# Altium PCB Communication_board.PcbDoc (part 2 of 2)
Units mm, origin at the board's own origin, x right, y up, seen from the top; angles counter-clockwise.
Board outline 123 x 68.2 mm, 6 copper layers (Top Layer, Mid-Layer 1, Internal Plane 1, Mid-Layer 2, Mid-Layer 3, Bottom Layer); 199 components, 176 nets, 1115 pads, 336 vias.
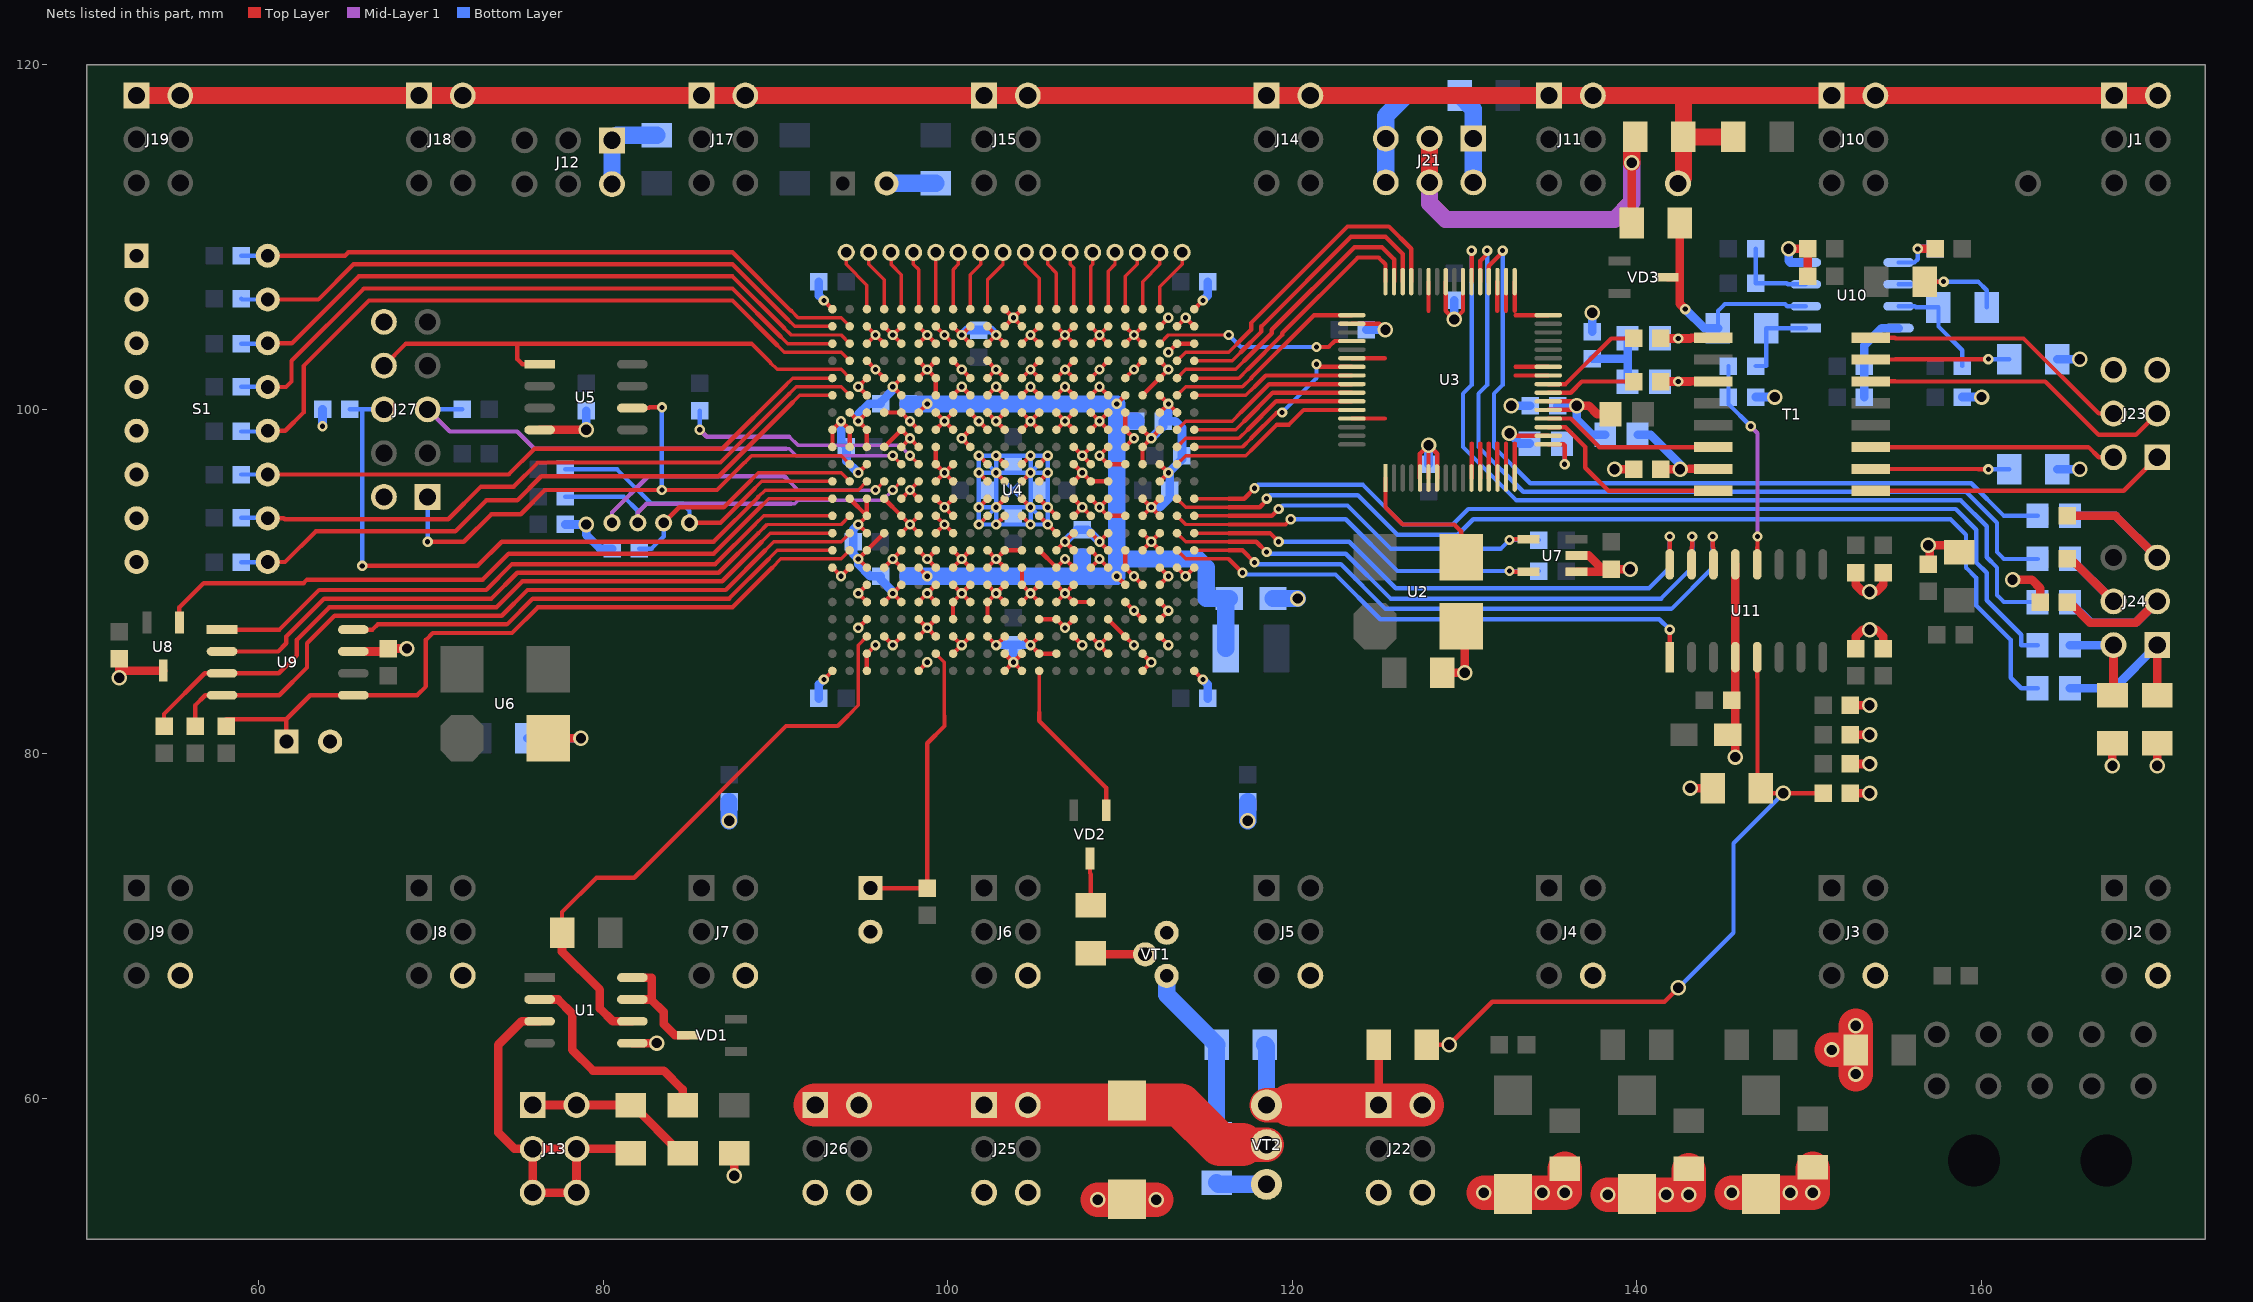
[diagram p6: the nets of this part, all layers, seen from the top]

## Via types
v1: diameter 0.6, hole 0.3, Top Layer to Bottom Layer, tented top, 188 vias
v2: diameter 0.9, hole 0.6, Top Layer to Bottom Layer, 100 vias
v3: diameter 0.6, hole 0.3, Top Layer to Bottom Layer, 48 vias

## Nets (pads, with @x,y where several pads share a name; then routed paths per layer and width w, separated by ;. In a path a pad name is that pad's centre, name@x,y a point inside that pad or via, vN(x,y) a via of type N, cw(c..) or ccw(c..) an arc to the next point about the centre after c; other vN are vias at no path point) (continued)
DCLK: J27.1 U4.K2 U5.6 | length 35.9
  Top Layer w0.2: 88.2,96.9 88.6,97.3 93.8,97.3 U4.K2@94.3,96.8
  Top Layer w0.254: v3(69.8,92.3) 71.9,92.3 73.5,93.9 75.2,93.9 76.6,95.3 v3(83.4,95.3) 86.6,95.3 88.2,96.9 ; U5.6@81.685,100.06 82.66,100.06 82.7,100.1 v3(83.4,100.1)
  Bottom Layer w0.254: v3(69.8,92.3) J27.1@69.8,94.9 ; v3(83.4,95.3) v3(83.4,100.1)
ETHADDRSELECT0: R13.1 S1.16 U4.B2 | length 37.2
  Top Layer w0.2: 90.9,105.7 91.3,105.3 93.8,105.3 U4.B2@94.3,104.8
  Top Layer w0.254: S1.16@60.52,108.9 65,108.9 65.2,109.1 87.5,109.1 90.9,105.7
  Bottom Layer w0.254: R13.1@58.987,108.9 S1.16@60.52,108.9
ETHADDRSELECT1: R14.1 S1.15 U4.B1 | length 36.7
  Top Layer w0.2: 90.7,105.2 91.1,104.8 U4.B1@93.3,104.8
  Top Layer w0.254: S1.15@60.52,106.36 63.46,106.36 65.5,108.4 87.5,108.4 90.7,105.2
  Bottom Layer w0.254: R14.1@58.987,106.4 59.027,106.36 S1.15@60.52,106.36
ETHADDRSELECT2: R15.1 S1.14 U4.C2 | length 38.5
  Top Layer w0.2: 90.5,104.7 90.9,104.3 93.8,104.3 U4.C2@94.3,103.8
  Top Layer w0.254: S1.14@60.52,103.82 61.92,103.82 65.8,107.7 87.5,107.7 90.5,104.7
  Bottom Layer w0.254: R15.1@58.987,103.8 60.5,103.8 S1.14@60.52,103.82
ETHADDRSELECT3: R16.1 S1.13 U4.C1 | length 38.7
  Top Layer w0.2: 90.3,104.2 90.7,103.8 U4.C1@93.3,103.8
  Top Layer w0.254: S1.13@60.52,101.28 61.58,101.28 61.9,101.6 61.9,102.8 66.1,107 87.5,107 90.3,104.2
  Bottom Layer w0.254: R16.1@58.987,101.3 60.5,101.3 S1.13@60.52,101.28
ETHADDRSELECT4: R17.1 S1.12 U4.D2 | length 41.5
  Top Layer w0.2: 90.1,103.7 90.5,103.3 93.8,103.3 U4.D2@94.3,102.8
  Top Layer w0.254: S1.12@60.52,98.74 61.54,98.74 62.6,99.8 62.6,102.5 66.4,106.3 87.5,106.3 90.1,103.7
  Bottom Layer w0.254: R17.1@58.987,98.7 60.48,98.7 S1.12@60.52,98.74
ETHADDRSELECT5: R18.1 S1.11 U4.E1 | length 36.6
  Top Layer w0.2: 90.6,101.4 91,101.8 U4.E1@93.3,101.8
  Top Layer w0.254: S1.11@60.52,96.2 74.5,96.2 76,97.7 86.9,97.7 90.6,101.4
  Bottom Layer w0.254: R18.1@58.987,96.2 S1.11@60.52,96.2
ETHADDRSELECT6: R19.1 S1.10 U4.F2 | length 38.8
  Top Layer w0.2: 90.8,100.9 91.2,101.3 93.8,101.3 U4.F2@94.3,100.8
  Top Layer w0.254: S1.10@60.52,93.66 61.44,93.66 61.5,93.6 71,93.6 72.9,95.5 74.8,95.5 76.2,96.9 86.8,96.9 90.8,100.9
  Bottom Layer w0.254: R19.1@58.987,93.7 60.48,93.7 S1.10@60.52,93.66
ETHADDRSELECT7: R20.1 S1.9 U4.F1 | length 38.3
  Top Layer w0.2: 91,100.4 91.4,100.8 U4.F1@93.3,100.8
  Top Layer w0.254: S1.9@60.52,91.12 61.52,91.12 63.3,92.9 71.4,92.9 73.2,94.7 75,94.7 76.4,96.1 86.7,96.1 91,100.4
  Bottom Layer w0.254: R20.1@58.987,91.1 60.5,91.1 S1.9@60.52,91.12
ETHRX_CLK: U3.52 U4.C20 | length 11.8
  Top Layer w0.2: U4.C20@112.3,103.8 112.8,104.3 v3(116.3,104.3)
  Top Layer w0.254: v3(121.4,103.6) 122.1,103.6 122.45,103.95 U3.52@123.45,103.95
  Bottom Layer w0.254: v3(116.3,104.3) 117,103.6 v3(121.4,103.6)
ETHRX_DV: U3.49 U4.F21 | length 12.1
  Top Layer w0.2: U4.F21@113.3,100.8 113.8,101.3 117.1,101.3 117.6,101.8
  Top Layer w0.254: 117.6,101.8 121.25,105.45 U3.49@123.45,105.45
ETHRXD0: U3.48 U4.E22 | length 15.2
  Top Layer w0.2: U4.E22@114.3,101.8 116.9,101.8 117.4,102.3
  Top Layer w0.254: 117.4,102.3 119.4,104.3 119.4,104.4 123.8,108.8 125,108.8 125.4,108.4 U3.48@125.4,107.4
ETHRXD1: U3.47 U4.E21 | length 17.5
  Top Layer w0.2: U4.E21@113.3,101.8 113.8,102.3 116.7,102.3 117.2,102.8
  Top Layer w0.254: 117.2,102.8 118.8,104.4 118.8,104.6 123.6,109.4 125.2,109.4 125.9,108.7 U3.47@125.9,107.4
ETHRXD2: U3.46 U4.D22 | length 17.3
  Top Layer w0.2: U4.D22@114.3,102.8 116.5,102.8 117,103.3
  Top Layer w0.254: 117,103.3 118.2,104.5 118.2,104.8 123.4,110 125.4,110 126.4,109 U3.46@126.4,107.4
ETHRXD3: U3.45 U4.D21 | length 19.5
  Top Layer w0.2: U4.D21@113.3,102.8 113.8,103.3 116.3,103.3 116.8,103.8
  Top Layer w0.254: 116.8,103.8 117.6,104.6 117.6,105 123.2,110.6 125.6,110.6 126.9,109.3 U3.45@126.9,107.4
ETHTX_CLK: U3.55 U4.J22 | length 11.7
  Top Layer w0.2: U4.J22@114.3,97.8 117.1,97.8 117.6,98.3
  Top Layer w0.254: 117.6,98.3 119.1,99.8 v3(119.4,99.8) ; v3(121.4,102.6) 121.55,102.45 U3.55@123.45,102.45
  Bottom Layer w0.254: v3(119.4,99.8) 121.4,101.8 v3(121.4,102.6)
ETHTX_EN: U3.56 U4.F22 | length 9.6
  Top Layer w0.2: U4.F22@114.3,100.8 117.3,100.8 117.8,101.3
  Top Layer w0.254: 117.8,101.3 118.45,101.95 U3.56@123.45,101.95
ETHTXD0: U3.57 U4.H21 | length 11.2
  Top Layer w0.2: U4.H21@113.3,98.8 113.8,99.3 116.5,99.3 117,99.8
  Top Layer w0.254: 117,99.8 118.65,101.45 U3.57@123.45,101.45
ETHTXD1: U3.58 U4.H22 | length 10
  Top Layer w0.2: U4.H22@114.3,98.8 116.7,98.8 117.2,99.3
  Top Layer w0.254: 117.2,99.3 118.85,100.95 U3.58@123.45,100.95
ETHTXD2: U3.59 U4.J21 | length 11.2
  Top Layer w0.2: U4.J21@113.3,97.8 113.8,98.3 116.9,98.3 117.4,98.8
  Top Layer w0.254: 117.4,98.8 119.05,100.45 U3.59@123.45,100.45
ETHTXD3: U3.60 U4.K21 | length 11.5
  Top Layer w0.2: U4.K21@113.3,96.8 113.8,97.3 117.3,97.3 117.8,97.8
  Top Layer w0.254: 117.8,97.8 119.1,99.1 119.8,99.1 120.65,99.95 U3.60@123.45,99.95
ETHVCCA: C7.2 L1.2 L2.1 U3.21 U3.22 | length 9.3
  Top Layer w0.254: U3.22@134.85,100.45 136.25,100.45 v2(136.5,100.2)
  Top Layer w0.256: U3.21@134.85,99.95 v2@136.25,99.95
  Top Layer w0.5: v2(136.5,100.2) 137.2,100.2 137.7,99.7 L1.2@138.46,99.7
  Bottom Layer w0.5: C7.2@135.387,100.2 v2(136.5,100.2) 136.5,99.4 137.4,98.5 L2.1@138.16,98.5
FANON: U4.AB13 VD2.1 | length 9.7
  Top Layer w0.2: 105.3,82.4 U4.AB13@105.3,84.8
  Top Layer w0.254: 105.3,82.4 105.3,81.9 109.192,78.008 VD2.1@109.192,76.71
FANPOWER: J22.1 J22.2 R37.2 R52.2 VT2.EMIT | length 16.1
  Top Layer w0.5: J22.1@125,59.6 125,63.097 R52.2@125.003,63.1
  Top Layer w2: VT2.EMIT@118.5,59.6 119.9,59.6
  Top Layer w2.5: 119.9,59.6 J22.1@125,59.6 J22.2@127.54,59.6
  Bottom Layer w1: R37.2@118.397,63.1 118.5,62.997 VT2.EMIT@118.5,59.6
FANPOWER_MEASURE: C59.2 R52.1 R55.2 U11.5 | length 41.2
  Top Layer w0.254: R52.1@127.797,63.1 v2(129.1,63.1) 131.6,65.6 141.6,65.6 v2(142.4,66.4) ; U11.5@146.98,85.6 146.98,84.42 147,84.4 147,78.197 147.497,77.7 C59.2@150.813,77.7
  Bottom Layer w0.254: v2(142.4,66.4) 145.6,69.6 145.6,74.8 v2(148.5,77.7)
FLASH_NCS: R35.1 U4.P2 U9.4 | length 44.2
  Top Layer w0.2: 89.4,91.8 89.9,92.3 93.8,92.3 U4.P2@94.3,92.8
  Top Layer w0.254: R35.1@56.3,81.587 56.3,82.8 56.89,83.39 U9.4@57.865,83.39 61.19,83.39 62.8,85 62.8,86.4 64.4,88 74.1,88 75.6,89.5 87.1,89.5 89.4,91.8
FLASH_NRESET: R34.1 U4.P1 U9.3 | length 44.4
  Top Layer w0.2: 89.2,92.3 89.7,92.8 U4.P1@93.3,92.8
  Top Layer w0.254: R34.1@54.5,81.587 54.5,82.3 56.86,84.66 U9.3@57.865,84.66 61.16,84.66 62.2,85.7 62.2,86.6 64.1,88.5 73.8,88.5 75.3,90 86.9,90 89.2,92.3
FLASH_NWP: J28.1 R36.1 U4.R2 U9.5 | length 43.6
  Top Layer w0.2: 89.8,90.8 90.3,91.3 93.8,91.3 U4.R2@94.3,91.8
  Top Layer w0.254: R36.1@58.1,81.587 58.1,82 61.6,82 ; J28.1@61.6,80.7 61.6,82 ; 89.8,90.8 87.5,88.5 76.2,88.5 74.7,87 70.1,87 69.7,86.6 69.7,83.9 69.19,83.39 U9.5@65.485,83.39 62.99,83.39 61.6,82
FLASH_SCK: U4.N2 U9.2 | length 39.9
  Top Layer w0.2: 89,92.8 89.5,93.3 93.8,93.3 U4.N2@94.3,93.8
  Top Layer w0.254: U9.2@57.865,85.93 61.13,85.93 61.6,86.4 61.6,86.8 63.8,89 73.5,89 75,90.5 86.7,90.5 89,92.8
FLASH_SI: U4.N1 U9.1 | length 38.2
  Top Layer w0.2: 88.8,93.3 89.3,93.8 U4.N1@93.3,93.8
  Top Layer w0.254: U9.1@57.865,87.2 61.2,87.2 63.5,89.5 73.2,89.5 74.7,91 86.5,91 88.8,93.3
FLASH_SO: U4.R1 U9.8 | length 29.7
  Top Layer w0.2: 89.6,91.3 90.1,91.8 U4.R1@93.3,91.8
  Top Layer w0.254: U9.8@65.485,87.2 66.6,87.2 66.9,87.5 74.4,87.5 75.9,89 87.3,89 89.6,91.3
GND: C2.1 C3.1 C4.1 C5.1 C6.1 C7.1 C8.2 C9.1 C12.2 C13.1 C14.1 C15.1 C16.1 C17.1 C18.1 C19.1 C20.1 C21.1 C22.1 C23.1 C24.1 C25.- C26.1 C27.1 C28.1 C29.1 C30.1 C31.1 C32.1 C33.1 C34.1 C35.1 C36.1 C37.1 C38.1 C39.1 C40.1 C41.2 C42.- C43.2 C45.- C46.- C47.- C49.1 C50.1 C51.1 C56.1 C57.1 C58.1 C59.1 C60.1 C61.1 C62.- C63.1 C64.1 C65.1 J2.6 J3.6 J4.6 J5.6 J6.6 J7.6 J8.6 J9.6 J22.5 J22.6 J23.5 J23.6 J25.5 J25.6 J26.5 J26.6 J27.2 J27.10 J28.2 J29.2 R7.2 R21.2 R26.2 R28.2 R39.1 R54.1 R55.1 R56.1 R60.1 R61.1 S1.1 S1.2 S1.3 S1.4 S1.5 S1.6 S1.7 S1.8 U1.5 U2.2 U3.5 U3.6 U3.7 U3.11 U3.12 U3.13 U3.14 U3.15 U3.16 U3.18 U3.25 U3.26 U3.32 U3.33 U3.34 U3.35 U3.39 U3.41 U3.43 U3.50 U3.54 U3.61 U4.A1 U4.A11 U4.A12 U4.A22 U4.AA3 U4.AA8 U4.AA11 U4.AA12 U4.AA13 U4.AA14 U4.AA17 U4.AA19 U4.AB1 U4.AB3 U4.AB6 U4.AB11 U4.AB12 U4.AB19 U4.AB22 U4.B3 U4.B4 U4.B5 U4.B6 U4.B7 U4.B8 U4.B9 U4.B10 U4.B11 U4.B12 U4.B13 U4.B14 U4.B15 U4.B16 U4.B17 U4.B18 U4.B19 U4.B20 U4.B21 U4.B22 U4.C3 U4.C4 U4.C5 U4.C6 U4.C7 U4.C8 U4.C9 U4.C10 U4.C11 U4.C12 U4.C13 U4.C14 U4.C15 U4.C16 U4.C17 U4.C18 U4.C19 U4.C21 U4.C22 U4.D3 U4.D6 U4.D7 U4.D8 U4.D10 U4.D13 U4.D15 U4.D17 U4.D19 U4.D20 U4.E3 U4.E4 U4.E5 U4.E6 U4.E7 U4.E9 U4.E10 U4.E11 U4.E12 U4.E13 U4.E14 U4.E15 U4.E16 U4.E18 U4.E20 U4.F3 U4.F5 U4.F7 U4.F8 U4.F9 U4.F10 U4.F11 U4.F12 U4.F13 U4.F14 U4.F15 U4.F16 U4.F17 U4.F19 U4.F20 U4.G2 U4.G3 U4.G4 U4.G5 U4.G7 U4.G8 U4.G9 U4.G10 U4.G11 U4.G12 U4.G13 U4.G14 U4.G15 U4.G16 U4.G17 U4.G18 U4.G20 U4.G21 U4.H1 U4.H2 U4.H3 U4.H5 U4.H6 U4.H7 U4.H8 U4.H9 U4.H10 U4.H11 U4.H12 U4.H13 U4.H14 U4.H15 U4.H16 U4.H17 U4.H18 U4.H19 U4.H20 U4.J1 U4.J2 U4.J3 U4.J4 U4.J5 U4.J6 U4.J7 U4.J9 U4.J15 U4.J16 U4.J17 U4.J18 U4.J19 U4.K3 U4.K7 U4.K8 U4.K10 U4.K11 U4.K12 U4.K13 U4.K15 U4.K16 U4.K17 U4.K18 U4.K19 U4.K20 U4.L6 U4.L7 U4.L8 U4.L10 U4.L11 U4.L12 U4.L13 U4.L15 U4.L16 U4.L17 U4.L20 U4.M2 U4.M3 U4.M4 U4.M5 U4.M6 U4.M7 U4.M8 U4.M10 U4.M11 U4.M12 U4.M13 U4.M15 U4.M16 U4.M17 U4.M19 U4.M20 U4.N3 U4.N5 U4.N6 U4.N7 U4.N8 U4.N10 U4.N11 U4.N12 U4.N13 U4.N14 U4.N15 U4.N16 U4.N17 U4.N18 U4.N19 U4.N20 U4.P3 U4.P4 U4.P5 U4.P6 U4.P7 U4.P8 U4.P14 U4.P15 U4.P16 U4.P17 U4.P19 U4.P20 U4.R3 U4.R5 U4.R6 U4.R7 U4.R8 U4.R9 U4.R10 U4.R11 U4.R12 U4.R13 U4.R14 U4.R15 U4.R16 U4.R17 U4.R18 U4.R19 U4.R20 U4.T1 U4.T2 U4.T3 U4.T4 U4.T5 U4.T7 U4.T8 U4.T9 U4.T10 U4.T11 U4.T12 U4.T14 U4.T15 U4.T16 U4.T17 U4.T18 U4.T20 U4.T21 U4.T22 U4.U3 U4.U5 U4.U7 U4.U8 U4.U9 U4.U10 U4.U11 U4.U12 U4.U13 U4.U14 U4.U15 U4.U19 U4.U20 U4.V3 U4.V4 U4.V5 U4.V6 U4.V7 U4.V8 U4.V9 U4.V10 U4.V11 U4.V12 U4.V13 U4.V14 U4.V15 U4.V16 U4.V18 U4.V20 U4.W3 U4.W6 U4.W7 U4.W8 U4.W10 U4.W13 U4.W14 U4.W15 U4.W17 U4.W19 U4.W20 U4.Y4 U4.Y5 U4.Y6 U4.Y7 U4.Y8 U4.Y9 U4.Y10 U4.Y11 U4.Y12 U4.Y13 U4.Y15 U4.Y16 U4.Y17 U4.Y18 U4.Y20 U5.4 U6.2 U7.1 U7.2 U8.3 U9.7 U11.4 U11.13 VT1.EMIT | length 456.8
  Top Layer w0.254: v1(92.8,84.3) U4.AB1@93.3,84.8 ; v1(92.8,106.3) U4.A1@93.3,105.8 ; U4.T1@93.3,90.8 v1(93.8,90.3) U4.T2@94.3,90.8 ; U4.J1@93.3,97.8 U4.H1@93.3,98.8 v1(93.8,99.3) U4.H2@94.3,98.8 U4.J2@94.3,97.8 ; U4.M2@94.3,94.8 U4.N3@95.3,93.8 ; U4.G2@94.3,99.8 v1(94.8,99.3) ; v1(94.8,87.3) U4.W3@95.3,87.8 ; v1(94.8,96.3) U4.K3@95.3,96.8 ; U4.AB3@95.3,84.8 U4.AA3@95.3,85.8 v1(95.8,86.3) ; U4.V3@95.3,88.8 v1(94.8,89.3) U4.U3@95.3,89.8 ; U4.T3@95.3,90.8 v1(94.8,91.3) U4.R3@95.3,91.8 U4.P4@96.3,92.8 ; U4.P3@95.3,92.8 v1(94.8,93.3) U4.N3@95.3,93.8 ; U4.M3@95.3,94.8 U4.N3@95.3,93.8 ; U4.J3@95.3,97.8 U4.H3@95.3,98.8 v1(94.8,99.3) ; U4.G3@95.3,99.8 v1(94.8,99.3) ; U4.F3@95.3,100.8 v1(94.8,101.3) U4.E3@95.3,101.8 ; U4.D3@95.3,102.8 v1(95.8,102.3) U4.E4@96.3,101.8 ; U4.C3@95.3,103.8 v1(95.8,104.3) ; U4.B3@95.3,104.8 v1(95.8,104.3) ; U4.Y4@96.3,86.8 v1(96.8,86.3) U4.Y5@97.3,86.8 ; U4.V4@96.3,88.8 v1(96.8,89.3) ; U4.T4@96.3,90.8 v1(96.8,91.3) ; U4.M4@96.3,94.8 U4.N5@97.3,93.8 v1(97.8,93.3) U4.P6@98.3,92.8 ; U4.J4@96.3,97.8 U4.H5@97.3,98.8 v1(97.8,98.3) ; U4.G4@96.3,99.8 U4.G5@97.3,99.8 v1(97.8,99.3) U4.H6@98.3,98.8 ; U4.C4@96.3,103.8 v1(95.8,104.3) ; U4.B4@96.3,104.8 v1(96.8,104.3) ; U4.V5@97.3,88.8 v1(96.8,89.3) ; U4.U5@97.3,89.8 v1(96.8,89.3) ; U4.T5@97.3,90.8 v1(96.8,91.3) ; U4.R5@97.3,91.8 v1(96.8,91.3) ; U4.P5@97.3,92.8 U4.N6@98.3,93.8 ; U4.M5@97.3,94.8 v1(97.8,95.3) ; U4.J5@97.3,97.8 v1(97.8,98.3) ; U4.F5@97.3,100.8 v1(96.8,101.3) U4.E5@97.3,101.8 ; U4.C5@97.3,103.8 v1(96.8,104.3) ; U4.B5@97.3,104.8 v1(96.8,104.3) ; U4.AB6@98.3,84.8 v1(98.8,85.3) ; U4.Y6@98.3,86.8 U4.W7@99.3,87.8 ; U4.W6@98.3,87.8 v1(98.8,87.3) U4.Y7@99.3,86.8 ; U4.V6@98.3,88.8 U4.U7@99.3,89.8 ; U4.R6@98.3,91.8 v1(98.8,91.3) ; U4.M6@98.3,94.8 v1(97.8,95.3) ; U4.L6@98.3,95.8 v1(97.8,95.3) ; U4.J6@98.3,97.8 v1(97.8,98.3) ; U4.E6@98.3,101.8 v1(98.8,102.3) ; U4.D6@98.3,102.8 v1(98.8,102.3) ; U4.C6@98.3,103.8 v1(98.8,104.3) ; U4.B6@98.3,104.8 v1(98.8,104.3) ; v1(98.8,89.3) U4.V7@99.3,88.8 ; U4.T7@99.3,90.8 v1(98.8,91.3) ; U4.R7@99.3,91.8 v1(98.8,91.3) ; U4.P7@99.3,92.8 v1(99.8,93.3) ; U4.N7@99.3,93.8 v1(99.8,93.3) ; U4.M7@99.3,94.8 v1(99.8,94.3) ; U4.L7@99.3,95.8 U4.K8@100.3,96.8 ; U4.J7@99.3,97.8 U4.K7@99.3,96.8 v1(99.8,96.3) U4.L8@100.3,95.8 ; U4.H7@99.3,98.8 v1(99.8,99.3) ; U4.G7@99.3,99.8 v1(99.8,99.3) ; U4.F7@99.3,100.8 U4.E7@99.3,101.8 v1(98.8,102.3) ; U4.D7@99.3,102.8 v1(98.8,102.3) ; U4.C7@99.3,103.8 v1(98.8,104.3) ; U4.B7@99.3,104.8 v1(99.8,104.3) U4.C8@100.3,103.8 ; U4.AA8@100.3,85.8 v1(100.8,86.3) ; U4.Y8@100.3,86.8 v1(100.8,86.3) ; U4.W8@100.3,87.8 U4.V8@100.3,88.8 U4.U9@101.3,89.8 ; U4.U8@100.3,89.8 v1(100.8,89.3) U4.V9@101.3,88.8 ; U4.T8@100.3,90.8 v1(100.8,91.3) ; U4.R8@100.3,91.8 v1(100.8,91.3) ; U4.P8@100.3,92.8 v1(99.8,93.3) ; U4.N8@100.3,93.8 v1(99.8,94.3) ; U4.M8@100.3,94.8 v1(99.8,94.3) ; U4.H8@100.3,98.8 v1(99.8,99.3) ; U4.G8@100.3,99.8 v1(99.8,99.3) ; U4.F8@100.3,100.8 v1(100.8,101.3) U4.F9@101.3,100.8 ; U4.D8@100.3,102.8 v1(100.8,102.3) U4.E9@101.3,101.8 ; U4.B8@100.3,104.8 v1(100.8,104.3) ; U4.Y9@101.3,86.8 v1(100.8,86.3) ; U4.T9@101.3,90.8 v1(100.8,91.3) ; U4.R9@101.3,91.8 v1(100.8,91.3) ; U4.J9@101.3,97.8 v1(100.8,98.3) U4.H9@101.3,98.8 ; U4.G9@101.3,99.8 v1(101.8,99.3) U4.H10@102.3,98.8 ; U4.C9@101.3,103.8 v1(100.8,104.3) ; U4.B9@101.3,104.8 v1(100.8,104.3) ; v1(101.8,93.3) U4.N10@102.3,93.8 ; v1(101.8,94.3) U4.M10@102.3,94.8 ; v1(101.8,96.3) U4.L10@102.3,95.8 ; v1(101.8,97.3) U4.K10@102.3,96.8 ; U4.Y10@102.3,86.8 v1(102.8,86.3) U4.Y11@103.3,86.8 ; U4.W10@102.3,87.8 U4.V10@102.3,88.8 U4.U11@103.3,89.8 ; U4.U10@102.3,89.8 v1(102.8,89.3) U4.V11@103.3,88.8 ; U4.T10@102.3,90.8 v1(102.8,91.3) ; U4.R10@102.3,91.8 v1(102.8,91.3) ; U4.G10@102.3,99.8 v1(102.8,99.3) ; U4.F10@102.3,100.8 v1(102.8,101.3) U4.F11@103.3,100.8 ; U4.E10@102.3,101.8 v1(102.8,102.3) ; U4.D10@102.3,102.8 v1(102.8,102.3) ; U4.C10@102.3,103.8 v1(102.8,104.3) ; U4.B10@102.3,104.8 v1(102.8,104.3) ; v1(102.8,93.3) U4.N11@103.3,93.8 ; v1(102.8,94.3) U4.M11@103.3,94.8 ; v1(102.8,96.3) U4.L11@103.3,95.8 ; v1(102.8,97.3) U4.K11@103.3,96.8 ; U4.AB11@103.3,84.8 v1(103.8,85.3) ; U4.AA11@103.3,85.8 v1(103.8,85.3) ; U4.T11@103.3,90.8 v1(102.8,91.3) ; U4.H11@103.3,98.8 v1(102.8,99.3) ; U4.G11@103.3,99.8 v1(102.8,99.3) ; U4.E11@103.3,101.8 v1(102.8,102.3) ; U4.C11@103.3,103.8 v1(102.8,104.3) ; U4.B11@103.3,104.8 v1(103.8,105.3) ; U4.A11@103.3,105.8 v1(103.8,105.3) ; U4.AB12@104.3,84.8 v1(103.8,85.3) ; U4.AA12@104.3,85.8 v1(103.8,85.3) ; U4.Y12@104.3,86.8 v1(104.8,86.3) ; U4.V12@104.3,88.8 v1(104.8,89.3) ; U4.T12@104.3,90.8 U4.U12@104.3,89.8 v1(104.8,89.3) ; U4.R12@104.3,91.8 U4.R11@103.3,91.8 v1(102.8,91.3) ; U4.N12@104.3,93.8 v1(104.8,93.3) ; U4.M12@104.3,94.8 v1(104.8,94.3) ; U4.L12@104.3,95.8 v1(104.8,96.3) ; U4.K12@104.3,96.8 v1(104.8,97.3) ; U4.H12@104.3,98.8 U4.G13@105.3,99.8 ; U4.G12@104.3,99.8 v1(104.8,99.3) U4.H13@105.3,98.8 ; U4.F12@104.3,100.8 v1(104.8,101.3) U4.F13@105.3,100.8 ; U4.E12@104.3,101.8 v1(104.8,102.3) ; U4.C12@104.3,103.8 v1(104.8,104.3) ; U4.B12@104.3,104.8 v1(103.8,105.3) ; U4.A12@104.3,105.8 v1(103.8,105.3) ; U4.Y13@105.3,86.8 v1(104.8,86.3) ; U4.W13@105.3,87.8 U4.W14@106.3,87.8 v1(106.8,87.3) U4.W15@107.3,87.8 ; U4.V13@105.3,88.8 v1(104.8,89.3) ; U4.U13@105.3,89.8 v1(104.8,89.3) ; U4.R13@105.3,91.8 U4.T14@106.3,90.8 v1(106.8,91.3) U4.T15@107.3,90.8 ; U4.N13@105.3,93.8 v1(105.8,93.3) U4.P14@106.3,92.8 ; U4.M13@105.3,94.8 v1(105.8,94.3) U4.N14@106.3,93.8 ; U4.L13@105.3,95.8 v1(105.8,96.3) ; U4.K13@105.3,96.8 v1(105.8,97.3) ; U4.E13@105.3,101.8 v1(104.8,102.3) ; U4.D13@105.3,102.8 v1(104.8,102.3) ; U4.C13@105.3,103.8 v1(104.8,104.3) ; U4.B13@105.3,104.8 v1(104.8,104.3) ; U4.AA14@106.3,85.8 U4.AA13@105.3,85.8 v1(104.8,86.3) ; U4.V14@106.3,88.8 v1(106.8,89.3) ; U4.U14@106.3,89.8 v1(106.8,89.3) ; U4.R14@106.3,91.8 v1(106.8,92.3) ; U4.H14@106.3,98.8 U4.G15@107.3,99.8 ; U4.G14@106.3,99.8 v1(106.8,99.3) U4.H15@107.3,98.8 ; U4.F14@106.3,100.8 v1(106.8,101.3) U4.F15@107.3,100.8 ; U4.E14@106.3,101.8 v1(106.8,102.3) ; U4.C14@106.3,103.8 v1(106.8,104.3) ; U4.B14@106.3,104.8 v1(106.8,104.3) ; U4.Y15@107.3,86.8 v1(107.8,86.3) ; U4.U15@107.3,89.8 v1(106.8,89.3) ; U4.R15@107.3,91.8 v1(106.8,92.3) ; U4.P15@107.3,92.8 v1(106.8,92.3) ; U4.N15@107.3,93.8 v1(107.8,94.3) ; U4.M15@107.3,94.8 v1(107.8,94.3) ; U4.L15@107.3,95.8 v1(107.8,96.3) ; U4.K15@107.3,96.8 v1(107.8,96.3) ; U4.J15@107.3,97.8 v1(107.8,97.3) ; U4.E15@107.3,101.8 v1(106.8,102.3) ; U4.D15@107.3,102.8 v1(106.8,102.3) ; U4.C15@107.3,103.8 v1(106.8,104.3) ; U4.B15@107.3,104.8 v1(106.8,104.3) ; U4.Y16@108.3,86.8 v1(108.8,86.3) ; U4.V16@108.3,88.8 U4.V15@107.3,88.8 v1(106.8,89.3) ; U4.T16@108.3,90.8 v1(108.8,91.3) ; U4.R16@108.3,91.8 v1(108.8,91.3) ; U4.P16@108.3,92.8 v1(108.8,92.3) ; U4.N16@108.3,93.8 v1(107.8,94.3) ; U4.M16@108.3,94.8 v1(108.8,94.3) ; U4.K16@108.3,96.8 v1(107.8,97.3) ; U4.J16@108.3,97.8 v1(107.8,97.3) ; U4.H16@108.3,98.8 v1(108.8,99.3) ; U4.G16@108.3,99.8 v1(108.8,99.3) ; U4.F16@108.3,100.8 v1(108.8,101.3) U4.F17@109.3,100.8 ; U4.E16@108.3,101.8 v1(108.8,102.3) U4.D17@109.3,102.8 ; U4.C16@108.3,103.8 v1(108.8,104.3) ; U4.B16@108.3,104.8 v1(108.8,104.3) ; U4.AA17@109.3,85.8 v1(108.8,86.3) ; U4.Y17@109.3,86.8 v1(108.8,86.3) ; U4.W17@109.3,87.8 U4.Y18@110.3,86.8 v1(110.8,86.3) ; U4.T17@109.3,90.8 v1(108.8,91.3) ; U4.R17@109.3,91.8 v1(108.8,92.3) ; U4.P17@109.3,92.8 v1(108.8,92.3) ; U4.M17@109.3,94.8 v1(108.8,94.3) ; U4.L17@109.3,95.8 U4.L16@108.3,95.8 v1(107.8,96.3) ; U4.J17@109.3,97.8 v1(108.8,97.3) U4.K17@109.3,96.8 U4.K18@110.3,96.8 ; U4.H17@109.3,98.8 v1(108.8,99.3) ; U4.G17@109.3,99.8 v1(108.8,99.3) ; U4.C17@109.3,103.8 v1(108.8,104.3) ; U4.B17@109.3,104.8 v1(108.8,104.3) ; U4.V18@110.3,88.8 v1(110.8,88.3) U4.W19@111.3,87.8 ; U4.R18@110.3,91.8 U4.T18@110.3,90.8 v1(110.8,90.3) U4.U19@111.3,89.8 ; U4.N18@110.3,93.8 U4.N17@109.3,93.8 v1(108.8,94.3) ; U4.J18@110.3,97.8 v1(110.8,98.3) U4.H18@110.3,98.8 U4.G18@110.3,99.8 ; U4.E18@110.3,101.8 v1(110.8,102.3) U4.D19@111.3,102.8 ; U4.C18@110.3,103.8 v1(110.8,104.3) ; U4.B18@110.3,104.8 v1(110.8,104.3) ; U4.AB19@111.3,84.8 v1(111.8,85.3) U4.AA19@111.3,85.8 ; U4.R19@111.3,91.8 U4.P20@112.3,92.8 ; U4.P19@111.3,92.8 v1(111.8,92.3) U4.R20@112.3,91.8 ; U4.N19@111.3,93.8 U4.M20@112.3,94.8 ; U4.M19@111.3,94.8 v1(111.8,94.3) U4.N20@112.3,93.8 ; U4.K19@111.3,96.8 U4.J19@111.3,97.8 v1(111.8,98.3) ; U4.H19@111.3,98.8 v1(111.8,98.3) ; U4.F19@111.3,100.8 U4.E20@112.3,101.8 v1(112.8,102.3) U4.D20@112.3,102.8 ; U4.C19@111.3,103.8 v1(110.8,104.3) ; U4.B19@111.3,104.8 v1(110.8,104.3) ; U4.Y20@112.3,86.8 v1(112.8,86.3) ; U4.W20@112.3,87.8 v1(112.8,88.3) U4.V20@112.3,88.8 ; U4.U20@112.3,89.8 v1(112.8,90.3) U4.T20@112.3,90.8 ; U4.L20@112.3,95.8 v1(112.8,96.3) U4.K20@112.3,96.8 ; U4.H20@112.3,98.8 v1(111.8,98.3) ; U4.G20@112.3,99.8 v1(112.8,100.3) ; U4.F20@112.3,100.8 v1(112.8,100.3) ; U4.B20@112.3,104.8 v1(112.8,105.3) ; v1(112.8,103.3) U4.C21@113.3,103.8 U4.C22@114.3,103.8 ; U4.T21@113.3,90.8 v1(113.8,90.3) U4.T22@114.3,90.8 ; U4.G21@113.3,99.8 v1(112.8,100.3) ; U4.B21@113.3,104.8 v1(113.8,105.3) U4.B22@114.3,104.8 ; U4.AB22@114.3,84.8 v1(114.8,84.3) ; U4.A22@114.3,105.8 v1(114.8,106.3) ; U3.61@123.45,99.45 125.35,99.45 ; U3.54@123.45,102.95 125.35,102.95 ; U3.50@123.45,104.95 125.05,104.95 v2(125.4,104.6) ; U3.5@127.4,96 127.4,97.4 v2(127.9,97.9) ; U3.6@127.9,96 v2(127.9,97.9) ; 127.9,105.7 U3.43@127.9,107.4 ; U3.7@128.4,96 128.4,97.4 v2(127.9,97.9) ; U3.41@128.9,107.4 128.9,105.7 v2(129.4,105.2) 129.9,105.7 U3.39@129.9,107.4 ; U3.11@130.4,96 130.4,98 ; U3.12@130.9,96 130.9,98 ; U3.13@131.4,96 131.4,98 ; U3.14@131.9,96 131.9,98 ; 131.9,105.7 U3.35@131.9,107.4 ; U3.15@132.4,96 132.4,98 ; 132.4,105.7 U3.34@132.4,107.4 ; U3.16@132.9,96 132.9,98 ; 132.9,105.7 U3.33@132.9,107.4 ; v2@132.95,98.45 U3.18@134.85,98.45 ; 132.95,101.95 U3.25@134.85,101.95 ; 132.95,102.45 U3.26@134.85,102.45 ; 132.95,105.45 U3.32@134.85,105.45
  Top Layer w0.5: v2(51.9,84.4) C38.1@51.9,85.513 ; v2@51.916,84.816 U8.3@54.452,84.816 ; U9.7@65.485,85.93 67.343,85.93 C43.2@67.5,86.087 67.513,86.1 v2(68.6,86.1) ; U5.4@76.3,98.79 77.19,98.79 77.2,98.8 v2(79,98.8) ; U6.2@76.8,80.9 v2(78.7,80.9) ; U1.5@81.685,63.19 82.79,63.19 82.8,63.2 v2(83.1,63.2) ; v2(87.6,55.5) C2.1@87.6,56.803 ; C5.1@128.697,84.7 v2(130,84.7) 130,87.2 U2.2@129.8,87.4 ; U7.1@136.5,90.55 138.337,90.55 C37.1@138.5,90.713 ; U7.2@136.5,91.5 137.2,91.5 137.987,90.713 C37.1@138.5,90.713 ; v2(138.7,96.5) C9.1@139.813,96.5 ; v2(139.6,90.7) 138.513,90.7 C37.1@138.5,90.713 ; v2(143.1,78) R55.1@144.403,78 ; v2(145.7,79.8) 145.7,80.67 C62.-@145.27,81.1 145.71,81.54 145.71,83.9 U11.4@145.71,85.6 U11.13@145.71,90.985 ; C59.1@152.387,77.7 v2(153.5,77.7) ; C63.1@152.387,79.4 v2(153.5,79.4) ; R61.1@152.387,81.1 v2(153.5,81.1) ; C65.1@152.387,82.8 v2(153.5,82.8) ; C64.1@152.7,86.087 152.7,86.8 153.1,87.2 153.9,87.2 154.3,86.8 R60.1@154.3,86.087 ; C60.1@152.7,90.513 152.7,89.8 153.1,89.4 153.9,89.4 154.3,89.8 R56.1@154.3,90.513 ; v2(156.9,92.1) 158.297,92.1 R54.1@158.7,91.697 ; C58.1@157,91.087 v2@157,92.2 ; v2(161.8,90.1) 162.913,90.1 163.413,89.6 R21.2@163.413,88.8 ; v2(167.6,79.3) C41.2@167.6,80.603 ; v2(170.2,79.3) C40.1@170.2,80.603
  Top Layer w2: v2(108.7,54.1) 110.37,54.1 C42.-@110.4,54.13 110.43,54.1 v2(112.1,54.1) ; v2(131.1,54.5) 132.73,54.5 C45.-@132.8,54.43 132.87,54.5 v2(135.8,54.5) C49.1@135.8,55.903 ; v2(138.3,54.4) 139.93,54.4 140,54.33 140.07,54.4 v2(143,54.4) C50.1@143,55.803 ; v2(145.5,54.5) 147.13,54.5 C47.-@147.2,54.43 147.27,54.5 v2(150.2,54.5) C51.1@150.2,55.903 ; v2(151.309,62.797) R39.1@152.706,62.797 ; v2(152.706,61.4) R39.1@152.706,62.797 ; v2(152.706,64.194) R39.1@152.706,62.797
  Bottom Layer w0.254: v1(101.8,94.3) v1(105.8,94.3) ; v1(101.8,96.3) v1(105.8,96.3) ; v1(102.8,93.3) v1(102.8,97.3) ; v1(104.8,93.3) v1(104.8,97.3) ; v1(101.8,93.3) v1(105.8,97.3) ; v1(101.8,93.3) v1(105.8,93.3) ; v1(101.8,93.3) v1(101.8,97.3) ; v1(101.8,97.3) v1(105.8,93.3) ; v1(101.8,97.3) v1(105.8,97.3) ; v1(105.8,93.3) v1(105.8,97.3)
  Bottom Layer w0.5: v3(63.7,99) 63.7,99.987 R26.2@63.713,100 ; C39.1@75.597,80.9 v2(78.7,80.9) ; C15.1@77.787,93.3 v2(79,93.3) 79,92.7 79.8,91.9 R28.2@80.513,91.9 ; v2(79,98.8) C14.1@79,99.913 ; C19.1@92.513,83.2 92.513,84.013 v1(92.8,84.3) ; C16.1@92.513,107.4 92.513,106.587 v1(92.8,106.3) ; v1(93.8,99.3) 93.8,98.113 C28.1@94.113,97.8 94.113,96.987 v1(94.8,96.3) ; v1(94.8,93.3) 94.513,93.013 C31.1@94.513,92.3 94.513,91.587 v1(94.8,91.3) 94.8,91 95.5,90.3 C30.1@96.113,90.3 96.113,90.087 96.8,89.4 v1(96.8,89.3) ; v1(94.8,99.3) 94.8,99.7 95.4,100.3 C29.1@96.113,100.3 96.113,100.413 96.8,101.1 v1(96.8,101.3) ; v1(100.8,104.3) 101.087,104.587 C36.1@101.8,104.587 102.513,104.587 v1(102.8,104.3) ; v1(102.8,86.3) 102.813,86.313 C33.1@103.8,86.313 ; v1(103.8,85.3) C33.1@103.8,86.313 ; v1(104.8,86.3) 104.787,86.313 C33.1@103.8,86.313 ; v1(106.8,92.3) 107.487,92.987 C32.1@107.8,92.987 108.113,92.987 v1(108.8,92.3) ; v1(111.8,94.3) 112.3,94.3 112.887,94.887 C20.1@112.887,95.3 112.887,96.213 v1(112.8,96.3) 113.587,97.087 C35.1@113.587,97.3 113.587,98.913 113.2,99.3 C34.1@112.487,99.3 ; v1(111.8,98.3) 112.487,98.987 C34.1@112.487,99.3 ; v1(112.8,100.3) 112.8,99.613 C34.1@112.487,99.3 ; v1(114.8,84.3) 115.087,84.013 C22.1@115.087,83.2 ; v1(114.8,106.3) 115.087,106.587 C26.1@115.087,107.4 ; C4.1@124.287,104.6 v2(125.4,104.6) ; C6.1@127.9,96.787 v2(127.9,97.9) ; v2(129.4,105.2) C3.1@129.4,106.313 ; v2(132.6,98.6) 133.2,98 R7.2@133.76,98 ; v2(132.7,100.2) C7.1@133.813,100.2 ; C8.2@137.4,104.487 v2(137.4,105.6) ; C56.1@146.887,100.7 v2(148,100.7) ; C57.1@158.887,100.7 v2(160,100.7) ; C13.1@164.397,96.5 v2(165.7,96.5) ; C12.2@164.397,102.9 v2(165.7,102.9)
  Bottom Layer w1: v2(87.3,76.1) C23.1@87.3,77.213 ; v2(117.4,76.1) C17.1@117.4,77.213 ; C25.-@118.87,89 v2(120.3,89)
  other v2: 141.7,54.4 134.5,54.5 148.9,54.5 153.5,87.2 153.5,89.4
HV: J21.3 J21.4 R40.1 R41.1 | length 23.7
  Top Layer w0.5: v2(139.7,114.3) 139.7,110.803 R41.1@139.703,110.8
  Top Layer w1: J21.4@127.96,113.16 J21.3@127.96,115.7 ; v2(139.7,114.3) 139.7,115.597 R40.1@139.903,115.8
  Mid-Layer 1 w1: J21.4@127.96,113.16 127.96,111.94 128.9,111 138.7,111 139.7,112 v2(139.7,114.3)
HV_MEASURE: C56.2 R49.1 U11.12 | length 12.2
  Top Layer w0.254: U11.12@146.98,90.985 146.98,91.98 147,92 v3(147,92.6)
  Mid-Layer 1 w0.254: v3(146.6,99) 147,98.6 v3(147,92.6)
  Bottom Layer w0.254: R49.1@145.313,102.5 C56.2@145.313,100.7 145.313,100.287 v3(146.6,99)
IDREAD: U4.M1 U8.1 | length 41.4
  Top Layer w0.2: 89.2,94.4 89.6,94.8 U4.M1@93.3,94.8
  Top Layer w0.254: U8.1@55.392,87.61 55.392,88.492 56.8,89.9 62.6,89.9 62.8,90.1 73,90.1 74.5,91.6 86.4,91.6 89.2,94.4
JUMPER1: J29.1 R64.2 U4.AA7 | length 17.5
  Top Layer w0.2: U4.AA7@99.3,85.8 99.8,85.3 99.8,82.2
  Top Layer w0.254: J29.1@95.5,72.2 95.513,72.187 R64.2@98.8,72.187 98.8,80.6 99.8,81.6 99.8,82.2
NCE: J27.6 R26.1 U4.L3 | length 42.4
  Top Layer w0.2: 89,94.9 89.4,95.3 94.8,95.3 U4.L3@95.3,95.8
  Top Layer w0.254: v3(66,90.9) 72.7,90.9 74.1,92.3 86.4,92.3 89,94.9
  Bottom Layer w0.254: R26.1@65.287,100 66,100 ; v3(66,90.9) 66,100 ; J27.6@67.26,99.98 67.24,100 66,100
NCONFIG: J27.5 R25.1 U4.K5 | length 30.8
  Top Layer w0.2: v1(96.8,97.3) U4.K5@97.3,96.8
  Mid-Layer 1 w0.2: 90.6,97.7 90.8,97.7 91.2,97.3 v1(96.8,97.3)
  Mid-Layer 1 w0.254: J27.5@69.8,99.98 71.08,98.7 75,98.7 76,97.7 90.6,97.7
  Bottom Layer w0.254: J27.5@69.8,99.98 71.793,99.98 R25.1@71.813,100
NCSO: J27.8 U4.E2 U5.1 | length 30.7
  Top Layer w0.2: 89.7,102.7 90.1,102.3 93.8,102.3 U4.E2@94.3,101.8
  Top Layer w0.254: J27.8@67.26,102.52 68.54,103.8 75,103.8 ; U5.1@76.3,102.6 75.3,102.6 75,102.9 75,103.8 ; 89.7,102.7 88.6,103.8 75,103.8
NetC1_2: C1.2 J16.2 | length 2.9
  Bottom Layer w1: J16.2@96.443,113.103 C1.2@99.3,113.103
NetC8_1: C8.1 R8.1 R9.2 | length 4.5
  Bottom Layer w0.5: C8.1@137.4,102.913 139.448,102.913 ; R9.2@139.46,101.6 R8.1@139.46,104.1
NetC9_2: C9.2 L2.2 T1.15 | length 6
  Top Layer w0.5: C9.2@141.387,96.5 v2(142.5,96.5) ; 143.025,96.525 T1.15@144.425,96.525
  Bottom Layer w0.5: L2.2@140.04,98.5 140.8,98.5 142.5,96.8 v2(142.5,96.5)
NetC10_1: C10.1 R9.1 T1.11 | length 4.1
  Top Layer w0.5: C10.1@141.387,101.6 v3(142.4,101.6) 143.1,101.6 143.105,101.605 T1.11@144.425,101.605
  Bottom Layer w0.5: R9.1@141.34,101.6 v3(142.4,101.6)
NetC10_2: C10.2 U3.23 | length 5.2
  Top Layer w0.254: U3.23@134.85,100.95 136.15,100.95 136.8,101.6 C10.2@139.813,101.6
NetC11_1: C11.1 R8.2 T1.9 | length 4.1
  Top Layer w0.5: C11.1@141.387,104.1 v3(142.4,104.1) 143.1,104.1 143.145,104.145 T1.9@144.425,104.145
  Bottom Layer w0.5: R8.2@141.34,104.1 v3(142.4,104.1)
NetC11_2: C11.2 U3.24 | length 6.1
  Top Layer w0.254: U3.24@134.85,101.45 135.85,101.45 138.5,104.1 C11.2@139.813,104.1
NetC12_1: C12.1 T1.7 | length 8
  Top Layer w0.254: T1.7@153.575,102.875 154.975,102.875 155,102.9 v3(160.4,102.9)
  Bottom Layer w0.254: v3(160.4,102.9) C12.1@161.603,102.9
NetC13_2: C13.2 T1.2 | length 8
  Top Layer w0.254: T1.2@153.575,96.525 159.775,96.525 159.8,96.5 v3(160.4,96.5)
  Bottom Layer w0.254: v3(160.4,96.5) C13.2@161.603,96.5
NetC40_2: C40.2 J24.1 R31.2 | length 9
  Top Layer w0.5: C40.2@170.2,83.397 J24.1@170.2,86.3
  Bottom Layer w0.5: R31.2@165.14,83.8 167.7,83.8 J24.1@170.2,86.3
NetC41_1: C41.1 J24.2 R32.2 | length 5.4
  Top Layer w0.5: C41.1@167.6,83.397 167.66,83.457 J24.2@167.66,86.3
  Bottom Layer w0.5: R32.2@165.14,86.3 J24.2@167.66,86.3
NetC42_+: C42.+ J25.1 J25.2 J26.1 J26.2 VT2.COLL | length 27.2
  Top Layer w2: 117.1,57.3 VT2.COLL@118.5,57.3
  Top Layer w2.5: J26.1@92.3,59.6 J26.2@94.84,59.6 J25.1@102.1,59.6 J25.2@104.64,59.6 113.5,59.6 115.8,57.3 117.1,57.3
NetC52_2: C52.2 R43.2 U10.3 | length 4.9
  Bottom Layer w0.254: C52.2@146.887,109.3 R43.2@146.887,107.3 148.7,107.3 148.76,107.24 U10.3@149.8,107.24
NetC53_2: C53.2 R44.2 U10.5 | length 3.8
  Top Layer w0.5: v3(156.3,109.3) C53.2@157.313,109.3
  Bottom Layer w0.254: U10.5@155.185,108.51 156.11,108.51 156.3,108.7 v3(156.3,109.3)
  Bottom Layer w0.5: v3(156.3,109.3) R44.2@157.313,109.3
NetC54_2: C54.2 R47.2 U10.8 | length 5.4
  Bottom Layer w0.5: R47.2@153.187,100.7 C54.2@153.187,102.5 153.187,103.687 154.2,104.7 U10.8@155.185,104.7
NetC55_2: C55.2 R48.2 U10.4 | length 4.4
  Top Layer w0.5: v2(148.8,109.3) C55.2@149.913,109.3 R48.2@149.913,107.7
  Bottom Layer w0.5: v2(148.8,109.3) 148.8,108.6 148.89,108.51 U10.4@149.8,108.51
NetJ12_1: J12.1 J12.2 R2.1 | length 5.3
  Bottom Layer w1: J12.2@80.5,113.06 J12.1@80.5,115.6 80.797,115.897 R2.1@83.1,115.897
NetJ13_1: J13.1 J13.2 R1.2 R3.2 | length 9.9
  Top Layer w0.5: J13.1@75.9,59.6 J13.2@78.44,59.6 81.597,59.6 R1.2@81.6,59.597 81.703,59.597 84.497,56.803 R3.2@84.6,56.803
NetJ13_3: J13.3 J13.4 J13.5 J13.6 R1.1 U1.3 | length 23.9
  Top Layer w0.5: U1.3@76.3,64.46 75.26,64.46 73.9,63.1 73.9,58 74.84,57.06 J13.3@75.9,57.06 ; R1.1@81.6,56.803 81.343,57.06 J13.4@78.44,57.06 ; J13.3@75.9,57.06 J13.5@75.9,54.52 J13.6@78.44,54.52 J13.4@78.44,57.06 ; J13.3@75.9,57.06 J13.4@78.44,57.06
NetJ21_1: J21.1 J21.2 J21.5 J21.6 R6.1 | length 14
  Bottom Layer w1: J21.6@125.42,113.16 J21.5@125.42,115.7 125.42,117.02 126.6,118.2 R6.1@129.703,118.2 130.5,117.403 J21.1@130.5,115.7 J21.2@130.5,113.16
NetJ23_1: J23.1 T1.1 | length 17.4
  Top Layer w0.254: T1.1@153.575,95.255 168.255,95.255 J23.1@170.2,97.2
NetJ23_2: J23.2 T1.3 | length 14.3
  Top Layer w0.254: T1.3@153.575,97.795 166.205,97.795 166.8,97.2 J23.2@167.66,97.2
NetJ23_3: J23.3 T1.6 | length 18.4
  Top Layer w0.254: T1.6@153.575,101.605 154.995,101.605 155,101.6 163.7,101.6 166.8,98.5 168.96,98.5 J23.3@170.2,99.74
NetJ23_4: J23.4 T1.8 | length 15.9
  Top Layer w0.254: T1.8@153.575,104.145 154.955,104.145 155,104.1 162.44,104.1 166.8,99.74 J23.4@167.66,99.74
NetJ24_3: J24.3 R10.2 R21.1 | length 12.3
  Top Layer w0.5: R21.1@164.987,88.8 165.1,88.8 166.3,87.6 168.96,87.6 J24.3@170.2,88.84
  Bottom Layer w0.5: R10.2@165.14,88.8 166.34,87.6 168.96,87.6 J24.3@170.2,88.84
NetJ24_4: J24.4 R11.2 R23.2 | length 7.2
  Top Layer w0.5: R23.2@164.987,91.3 165.2,91.3 J24.4@167.66,88.84
  Bottom Layer w0.5: R11.2@165.14,91.3 165.2,91.3 J24.4@167.66,88.84
NetJ24_5: J24.5 R12.2 R22.2 | length 12.3
  Top Layer w0.5: R22.2@164.987,93.8 167.78,93.8 J24.5@170.2,91.38
  Bottom Layer w0.5: R12.2@165.14,93.8 167.78,93.8 J24.5@170.2,91.38
NetR3_1: R3.1 U1.2 | length 12.6
  Top Layer w0.5: U1.2@76.3,65.73 77.37,65.73 78.2,64.9 78.2,62.8 79.4,61.6 83.5,61.6 84.6,60.5 R3.1@84.6,59.597
NetR7_1: R7.1 U3.17 | length 3.3
  Top Layer w0.254: U3.17@134.85,97.95 135.75,97.95 135.8,97.9 v3(135.8,96.8)
  Bottom Layer w0.254: R7.1@135.64,98 135.8,97.84 v3(135.8,96.8)
NetR10_1: R10.1 U3.38 | length 52.5
  Top Layer w0.254: U3.38@130.4,107.4 v3(130.4,109.2)
  Bottom Layer w0.254: v3(130.4,109.2) 130.4,101.4 129.9,100.9 129.9,97.8 133,94.7 158.8,94.7 160.3,93.2 160.3,91.4 160.9,90.8 160.9,89.2 161.3,88.8 R10.1@163.26,88.8
NetR11_1: R11.1 U3.37 | length 49.7
  Top Layer w0.254: U3.37@130.9,107.4 130.9,108.6 131.3,109 v3(131.3,109.2)
  Bottom Layer w0.254: v3(131.3,109.2) 131.3,101.4 130.8,100.9 130.8,97.8 133.4,95.2 159.1,95.2 160.9,93.4 160.9,91.7 161.3,91.3 R11.1@163.26,91.3
NetR12_1: R12.1 U3.36 | length 47
  Top Layer w0.254: U3.36@131.4,107.4 131.4,108.3 132.2,109.1 v3(132.2,109.2)
  Bottom Layer w0.254: v3(132.2,109.2) 132.2,101.4 131.7,100.9 131.7,97.8 133.8,95.7 159.4,95.7 161.3,93.8 R12.1@163.26,93.8
NetR33_1: R33.1 VD2.3 | length 2.7
  Top Layer w0.254: VD2.3@108.252,73.916 108.252,73.048 108.3,73 R33.1@108.3,71.197
NetR33_2: R33.2 VT1.BASE | length 3.2
  Top Layer w0.5: R33.2@108.3,68.403 108.353,68.35 VT1.BASE@111.45,68.35
NetR37_1: R37.1 R38.1 VT1.COLL | length 10.4
  Bottom Layer w0.5: R37.1@115.6,63.097 R37.1@115.603,63.1
  Bottom Layer w1: VT1.COLL@112.7,67.1 112.7,66.003 R37.1@115.603,63.1 ; R38.1@115.6,57.897 R37.1@115.6,63.097
NetR38_2: R38.2 VT2.BASE | length 2.9
  Bottom Layer w1: R38.2@115.6,55.103 115.703,55 VT2.BASE@118.5,55
NetR41_2: R41.2 R45.1 U10.2 VD3.3 | length 14.5
  Top Layer w0.5: VD3.3@141.784,107.652 142.432,107.652 142.484,107.6 142.484,106.116 v3(142.8,105.8) ; 142.484,107.652 142.484,110.787 R41.2@142.497,110.8
  Bottom Layer w0.254: R45.1@144.703,104.7 144.703,105.7 145.103,106.1 148.6,106.1 148.73,105.97 U10.2@149.8,105.97
  Bottom Layer w0.5: v3(142.8,105.8) 143.9,104.7 R45.1@144.703,104.7
NetR42_2: R42.2 R46.1 U10.6 | length 7.5
  Top Layer w0.254: R42.2@156.697,107.4 v3(157.8,107.4)
  Bottom Layer w0.254: U10.6@155.185,107.24 156.06,107.24 156.22,107.4 v3(157.8,107.4) 159.8,107.4 160.3,106.9 160.3,105.903 R46.1@160.297,105.9
NetR45_2: R45.2 R49.2 U10.1 | length 5.1
  Bottom Layer w0.254: R49.2@146.887,102.5 146.89,102.503 147.497,102.503 R45.2@147.497,104.7 U10.1@149.8,104.7
NetR46_2: R46.2 R50.1 U10.7 | length 6.3
  Bottom Layer w0.254: U10.7@155.185,105.97 156.13,105.97 156.2,105.9 R46.2@157.503,105.9 157.503,104.797 158.887,103.413 R50.1@158.887,102.5
NetT1_14: T1.14 U3.20 | length 10.3
  Top Layer w0.254: U3.20@134.85,99.45 136.15,99.45 137.805,97.795 T1.14@144.425,97.795
NetT1_16: T1.16 U3.19 | length 11.8
  Top Layer w0.254: U3.19@134.85,98.95 135.85,98.95 137,97.8 137,96.6 138.345,95.255 T1.16@144.425,95.255
NetU1_7: U1.7 U1.8 VD1.3 | length 6.9
  Top Layer w0.5: U1.7@81.685,65.73 82.77,65.73 83.5,65 83.5,64.3 84.152,63.648 VD1.3@84.916,63.648 ; U1.8@81.685,67 82.8,67 82.8,65.76
NetU2_3: U2.3 U3.1 | length 8.2
  Top Layer w0.254: U3.1@125.4,96 125.4,94.3 126.4,93.3 129.4,93.3 129.8,92.9 U2.3@129.8,91.4
NLED0: R31.1 U4.M21 | length 59.3
  Top Layer w0.2: U4.M21@113.3,94.8 113.8,94.3 116.3,94.3
  Top Layer w0.254: 116.3,94.3 118.1,94.3 v3@118.5,94.7
  Bottom Layer w0.254: v3@118.6,94.9 v3(118.5,94.8) 118.7,95 123.8,95 126.1,92.7 129.6,92.7 130.5,93.6 158.2,93.6 159.1,92.7 159.1,90.8 159.7,90.2 159.7,88.6 161.7,86.6 161.7,84.4 162.3,83.8 R31.1@163.26,83.8
NLED1: R32.1 U4.M22 | length 56.4
  Top Layer w0.2: U4.M22@114.3,94.8 116.3,94.8
  Top Layer w0.254: 116.3,94.8 117.2,94.8 v3(117.8,95.4)
  Bottom Layer w0.254: v3@117.9,95.5 v3(117.8,95.4) 118,95.6 124.1,95.6 126.4,93.3 129.3,93.3 130.2,94.2 158.5,94.2 159.7,93 159.7,91.1 160.3,90.5 160.3,88.9 162.3,86.9 162.3,86.3 R32.1@163.26,86.3
NSTATUS: R27.1 U4.K6 | length 14.6
  Top Layer w0.2: v1(97.8,97.3) U4.K6@98.3,96.8
  Mid-Layer 1 w0.2: 90.8,98.4 91.3,97.9 97.2,97.9 v1(97.8,97.3)
  Mid-Layer 1 w0.254: v3(85.6,98.8) 86,98.4 90.8,98.4
  Bottom Layer w0.254: v3(85.6,98.8) R27.1@85.6,99.913
NVOLTAGECS: U4.R21 U11.1 | length 32.1
  Top Layer w0.2: U4.R21@113.3,91.8 113.8,91.3 116.3,91.3
  Top Layer w0.254: 116.3,91.3 v3(117.1,90.5) ; U11.1@141.9,85.6 v3(141.9,87.2)
  Bottom Layer w0.254: v3(117.1,90.5) 117.2,90.4 122.5,90.4 125.1,87.8 141.3,87.8 v3(141.9,87.2)
PHD_POWER: C44.2 C48.2 J1.1 J1.2 J10.1 J10.2 J11.1 J11.2 J14.1 J14.2 J15.1 J15.2 J17.1 J17.2 J18.1 J18.2 J19.1 J19.2 R40.2 | length 125.5
  Top Layer w1: J19.1@52.9,118.2 J19.2@55.44,118.2 J18.1@69.3,118.2 J18.2@71.84,118.2 J17.1@85.7,118.2 J17.2@88.24,118.2 J15.1@102.1,118.2 J15.2@104.64,118.2 J14.1@118.5,118.2 J14.2@121.04,118.2 J11.1@134.9,118.2 J11.2@137.44,118.2 J10.1@151.3,118.2 J10.2@153.84,118.2 J1.1@167.7,118.2 J1.2@170.24,118.2 ; C44.2@142.38,113.1 142.697,113.417 R40.2@142.697,115.8 ; 142.697,118.197 R40.2@142.697,115.8 ; C48.2@145.603,115.8 R40.2@142.697,115.8
STROBE: R5.2 U1.6 U4.Y3 | length 35.1
  Top Layer w0.2: 94.2,82.2 94.8,82.8 94.8,86.3 U4.Y3@95.3,86.8
  Top Layer w0.254: R5.2@77.603,69.6 77.603,70.803 79.6,72.8 81.8,72.8 82.6,73.6 90.6,81.6 93.6,81.6 94.2,82.2
  Top Layer w0.5: R5.2@77.603,69.6 77.603,68.497 79.8,66.3 79.8,65.2 80.54,64.46 U1.6@81.685,64.46
TCK: R28.1 U4.L2 X1.DRIL | length 14.7
  Top Layer w0.2: 88.6,95.9 89,96.3 93.8,96.3 U4.L2@94.3,95.8
  Top Layer w0.254: X1.DRIL@83.5,93.4 84.4,94.3 87,94.3 88.6,95.9
  Bottom Layer w0.254: R28.1@82.087,91.9 82.8,91.9 83.5,92.6 X1.DRIL@83.5,93.4
TDI: R30.1 U4.L5 X4.DRIL | length 21.9
  Top Layer w0.2: v1(96.8,95.3) U4.L5@97.3,95.8
  Mid-Layer 1 w0.2: 90.9,94.5 91.1,94.5 91.3,94.7 96.2,94.7 v1(96.8,95.3)
  Mid-Layer 1 w0.254: X4.DRIL@82,93.4 82,94 82.5,94.5 90.9,94.5
  Bottom Layer w0.254: R30.1@77.787,94.9 81.2,94.9 82,94.1 X4.DRIL@82,93.4
TDO: U4.L4 X2.DRIL | length 17.8
  Top Layer w0.2: v1(95.8,95.3) U4.L4@96.3,95.8
  Mid-Layer 1 w0.2: 90.8,95.8 91.3,95.3 v1(95.8,95.3)
  Mid-Layer 1 w0.254: X2.DRIL@80.5,93.4 80.5,94 82.6,96.1 90.5,96.1 90.8,95.8
THERMOSCL: R63.1 U4.N22 U7.4 | length 22.8
  Top Layer w0.2: U4.N22@114.3,93.8 116.3,93.8
  Top Layer w0.254: 116.3,93.8 118.8,93.8 v3(119.2,94.2) ; v3(132.6,92.4) 132.65,92.45 U7.4@133.706,92.45
  Bottom Layer w0.254: v3@119.3,94.3 v3(119.2,94.2) 119.4,94.4 123.2,94.4 125.7,91.9 132.1,91.9 v3(132.6,92.4) R63.1@134.313,92.4
THERMOSDA: R62.1 U4.N21 U7.5 | length 23.7
  Top Layer w0.2: U4.N21@113.3,93.8 113.8,93.3 116.3,93.3
  Top Layer w0.254: 116.3,93.3 119.6,93.3 v3(119.9,93.6) ; v3(132.6,90.6) 132.65,90.55 U7.5@133.706,90.55
  Bottom Layer w0.254: v3(119.9,93.6) 123.1,93.6 126.1,90.6 v3(132.6,90.6) R62.1@134.313,90.6
TMP0: U4.A3 X5.DRIL | length 3.8
  Top Layer w0.2: X5.DRIL@94.1,109.1 94.1,108.4 95.3,107.2 U4.A3@95.3,105.8
TMP1: U4.A4 X6.DRIL | length 3.7
  Top Layer w0.2: X6.DRIL@95.4,109.1 95.4,108.4 96.3,107.5 U4.A4@96.3,105.8
TMP2: U4.A5 X7.DRIL | length 3.5
  Top Layer w0.2: X7.DRIL@96.7,109.1 96.7,108.4 97.3,107.8 U4.A5@97.3,105.8
TMP3: U4.A6 X8.DRIL | length 3.4
  Top Layer w0.2: X8.DRIL@98,109.1 98,108.4 98.3,108.1 U4.A6@98.3,105.8
TMP4: U4.A7 X9.DRIL | length 3.3
  Top Layer w0.2: U4.A7@99.3,105.8 X9.DRIL@99.3,109.1
TMP5: U4.A8 X10.DRIL | length 3.4
  Top Layer w0.2: U4.A8@100.3,105.8 100.3,108.1 100.6,108.4 X10.DRIL@100.6,109.1
TMP6: U4.A9 X11.DRIL | length 3.5
  Top Layer w0.2: U4.A9@101.3,105.8 101.3,107.8 101.9,108.4 X11.DRIL@101.9,109.1
TMP7: U4.A10 X12.DRIL | length 3.7
  Top Layer w0.2: U4.A10@102.3,105.8 102.3,107.5 103.2,108.4 X12.DRIL@103.2,109.1
TMP8: U4.A13 X13.DRIL | length 3.6
  Top Layer w0.2: X13.DRIL@104.5,109.1 104.5,108.4 105.3,107.6 U4.A13@105.3,105.8
TMP9: U4.A14 X14.DRIL | length 3.5
  Top Layer w0.2: X14.DRIL@105.8,109.1 105.8,108.4 106.3,107.9 U4.A14@106.3,105.8
TMP10: U4.A15 X15.DRIL | length 3.4
  Top Layer w0.2: X15.DRIL@107.1,109.1 107.1,108.4 107.3,108.2 U4.A15@107.3,105.8
TMP11: U4.A16 X16.DRIL | length 3.3
  Top Layer w0.2: U4.A16@108.3,105.8 108.3,108.3 108.4,108.4 X16.DRIL@108.4,109.1
TMP12: U4.A17 X17.DRIL | length 3.5
  Top Layer w0.2: U4.A17@109.3,105.8 109.3,108 109.7,108.4 X17.DRIL@109.7,109.1
TMP13: U4.A18 X18.DRIL | length 3.6
  Top Layer w0.2: U4.A18@110.3,105.8 110.3,107.7 111,108.4 X18.DRIL@111,109.1
TMP14: U4.A19 X19.DRIL | length 3.7
  Top Layer w0.2: U4.A19@111.3,105.8 111.3,107.4 112.3,108.4 X19.DRIL@112.3,109.1
TMP15: U4.A20 X20.DRIL | length 3.8
  Top Layer w0.2: U4.A20@112.3,105.8 112.3,107.1 113.6,108.4 X20.DRIL@113.6,109.1
TMS: R29.1 U4.L1 X3.DRIL | length 18.2
  Top Layer w0.2: 88.8,95.4 89.2,95.8 U4.L1@93.3,95.8
  Top Layer w0.254: X3.DRIL@85,93.4 86.8,93.4 88.8,95.4
  Bottom Layer w0.254: R29.1@77.787,96.5 80.8,96.5 82.8,94.5 84.6,94.5 85,94.1 X3.DRIL@85,93.4
VCCA_PLL: C25.+ C29.2 C30.2 C32.2 C34.2 L3.2 U4.F18 U4.G6 U4.T6 U4.U18 | length 50.8
  Top Layer w0.254: U4.T6@98.3,90.8 v1(98.8,90.3) ; U4.G6@98.3,99.8 v1(98.8,100.3) ; v1(109.8,90.3) U4.U18@110.3,89.8 ; v1(109.8,100.3) U4.F18@110.3,100.8
  Bottom Layer w1: C30.2@97.687,90.3 v1(98.8,90.3) v1(109.8,90.3) v1(109.8,100.3) v1(98.8,100.3) C29.2@97.687,100.3 ; 107.8,90.3 C32.2@107.8,91.413 ; 109.8,91.3 114.5,91.3 115,90.8 115,89 C25.+@116.33,89 116.127,88.797 L3.2@116.127,86.1 ; 109.8,99.3 C34.2@110.913,99.3
VOLTAGEDIN: U4.R22 U11.14 | length 35.9
  Top Layer w0.2: U4.R22@114.3,91.8 116.3,91.8
  Top Layer w0.254: 116.3,91.8 117.1,91.8 v3(117.8,91.1) ; v3(144.4,92.6) 144.4,92 144.44,91.96 U11.14@144.44,90.985
  Bottom Layer w0.254: v3(117.8,91.1) 117.9,91 122.8,91 125.4,88.4 142,88.4 144.4,90.8 v3(144.4,92.6)
VOLTAGEDOUT: U4.P21 U11.15 | length 35.6
  Top Layer w0.2: U4.P21@113.3,92.8 113.8,92.3 116.3,92.3
  Top Layer w0.254: 116.3,92.3 117.9,92.3 v3(118.5,91.7) ; U11.15@143.17,90.985 143.17,91.97 143.2,92 v3(143.2,92.6)
  Bottom Layer w0.254: v3(118.5,91.7) 118.6,91.6 123.1,91.6 125.7,89 141.4,89 143.2,90.8 v3(143.2,92.6)
VOLTAGESCLK: U4.P22 U11.16 | length 32.8
  Top Layer w0.2: U4.P22@114.3,92.8 116.3,92.8
  Top Layer w0.254: 116.3,92.8 118.7,92.8 v3(119.2,92.3) ; U11.16@141.9,90.985 v3(141.9,92.6)
  Bottom Layer w0.254: v3(119.2,92.3) 123.3,92.3 126,89.6 140.7,89.6 141.9,90.8 v3(141.9,92.6)
pads on no net: J20.0 J22.3 J22.4 J25.3 J25.4 J26.3 J26.4 T1.4 T1.5 T1.10 T1.12 T1.13 U1.1 U1.4 U3.2 U3.9 U3.10 U3.27 U3.28 U3.29 U3.30 U3.31 U3.42 U3.44 U3.53 U3.64 U4.K22 U11.2 VD1.2 VD2.2
copper on no net: | length 37.2
  Top Layer w0.254: 71.668,62.216 72.684,63.232 73.192,61.708 71.668,62.216 ; 82.208,115.408 83.732,115.916 82.716,116.932 82.208,115.408 ; 89.368,61.416 90.384,62.432 90.892,60.908 89.368,61.416 ; 98.868,61.816 99.884,62.832 100.392,61.308 98.868,61.816 ; 121.768,61.816 122.784,62.832 123.292,61.308 121.768,61.816 ; 132.008,115.508 133.532,116.016 132.516,117.032 132.008,115.508 ; 170.808,95.392 171.316,93.868 172.332,94.884 170.808,95.392 ; 171.208,85.192 171.716,83.668 172.732,84.684 171.208,85.192

## Polygon pours and split planes (outlines as drawn)
GND on Top Layer "Top Layer-No Net 1" (hatched Horizontal grid 0.15 track 0.2, remove dead copper, pour order 1000): 124.7,106.2 124.7,97.3 133.6,97.3 133.6,106.2 124.7,106.2
+1.2V on Mid-Layer 2 "Top Layer-No Net 1" (hatched Vertical grid 0.15 track 0.2, remove dead copper, pour order 1000): 138,58 128,58 126,58 96,88 96,103 96,104 112,104 112,90 138,64 138,58
AGND on Mid-Layer 2 "Top Layer-No Net 1" (hatched Vertical grid 0.15 track 0.2, remove dead copper, pour order 1001): 162,59 162,66 158,70 158,91 149,100 149,102 155.5,102 159,105.5 172,105.5 172,116.5 51,116.5 51,110.5 133.5,110.5 137,107 141,103 141,100 141,99 152,88 152,81.5 152,59 162,59
+3.3V on Mid-Layer 3 "Top Layer-No Net 1" (hatched Horizontal grid 0.15 track 0.2, remove dead copper, pour order 1002): 149,57.5 51,57.5 51,109.5 133,109.5 135.5,107 136.5,106 141,106 146,101 150,101 156,101 159.5,104.5 172,104.5 172,57.5 149,57.5
GND on Mid-Layer 1 "Top Layer-No Net 1" (hatched Horizontal grid 0.15 track 0.2, remove dead copper, pour order 1000): 172,104.5 159.5,104.5 156,101 146.4,101 141.4,106 136.5,106 133,109.5 51,109.5 51,52.8 172,52.8 172,104.5
GND on Mid-Layer 1 "Top Layer-No Net 1" (hatched Horizontal grid 0.15 track 0.2, remove dead copper, pour order 1001): 99.2,100.1 99.2,90.75 109.612,90.75 109.612,100.1 99.2,100.1
GND on Internal Plane 1 (split plane): 136.322,106.422 136.374,106.382 136.435,106.356 136.5,106.348 141.296,106.348 146.222,101.422 146.274,101.382 146.335,101.356 146.4,101.348 155.6,101.348 155.665,101.356 155.726,101.382 155.778,101.422 159.304,104.948 172.49,104.948 172.49,52.31 50.51,52.31 50.51,109.848 132.896,109.848
AGND on Internal Plane 1 (split plane): 172.49,105.452 159.2,105.452 159.135,105.444 159.074,105.418 159.044,105.396 159.022,105.378 155.496,101.852 146.504,101.852 141.578,106.778 141.526,106.818 141.465,106.844 141.4,106.852 136.604,106.852 133.178,110.278 133.126,110.318 133.065,110.344 133,110.352 50.51,110.352 50.51,119.49 172.49,119.49

## Keep-outs
Keep-Out Layer:
  the board outline again, w0.1

## Other copper
Top Layer:
  text "LAT readout v2.0" at 50.8,61.6 h1.2
  text "Communication board" at 50.8,59.3 h1.2
  text "BINP, Talyshev" at 50.8,57 h1.2
  text "January 2012" at 50.8,54.7 h1.2
Internal Plane 1 (plane layer: these items are gaps in the copper):
  lines w0.5: 50,110.1 133,110.1 136.5,106.6 141.4,106.6 146.4,101.6 155.6,101.6 159.2,105.2 173,105.2

## Silkscreen, mask and mechanical layers (free items; w line width, h text height)
Top Overlay:
  the board outline again, w0.1
Top Solder:
  the board outline again, w1
Bottom Solder:
  the board outline again, w1
Mechanical 4:
  lines w0.1: 56.7,51.8 58.2,51.8 58.2,151.8 56.7,151.8 56.7,51.8 ; 73.1,51.8 73.1,151.8 74.6,151.8 74.6,51.8 73.1,51.8 ; 89.5,51.8 89.5,151.8 91,151.8 91,51.8 89.5,51.8 ; 105.9,51.8 105.9,151.8 107.4,151.8 107.4,51.8 105.9,51.8 ; 122.3,51.8 122.3,151.8 123.8,151.8 123.8,51.8 122.3,51.8 ; 138.7,51.8 138.7,151.8 140.2,151.8 140.2,51.8 138.7,51.8 ; 155.1,51.8 155.1,151.8 156.6,151.8 156.6,51.8 155.1,51.8 ; 171.5,51.8 171.5,151.8 173,151.8 173,51.8 171.5,51.8

## Text inside footprints (layer, text, board x,y; h text height)
S1: Top Overlay "1" at 56.456,108.392 h0.76; Top Overlay "2" at 56.456,105.852 h0.76; Top Overlay "3" at 56.456,103.312 h0.76; Top Overlay "4" at 56.456,100.772 h0.76; Top Overlay "5" at 56.456,98.232 h0.76; Top Overlay "6" at 56.456,95.692 h0.76; Top Overlay "7" at 56.456,93.152 h0.76; Top Overlay "8" at 56.456,90.612 h0.76; Top Overlay "On" at 57.98,109.408 h0.76; Top Overlay "Off" at 53.916,109.408 h0.76
VT2: Top Overlay "Heat sink" at 119.5,58.3 h0.25 r270; Top Overlay "Face" at 117.3,57.8 h0.25 r270